# EAGLE board double_in1_atmega_pannelized (EAGLE 9.1.0)
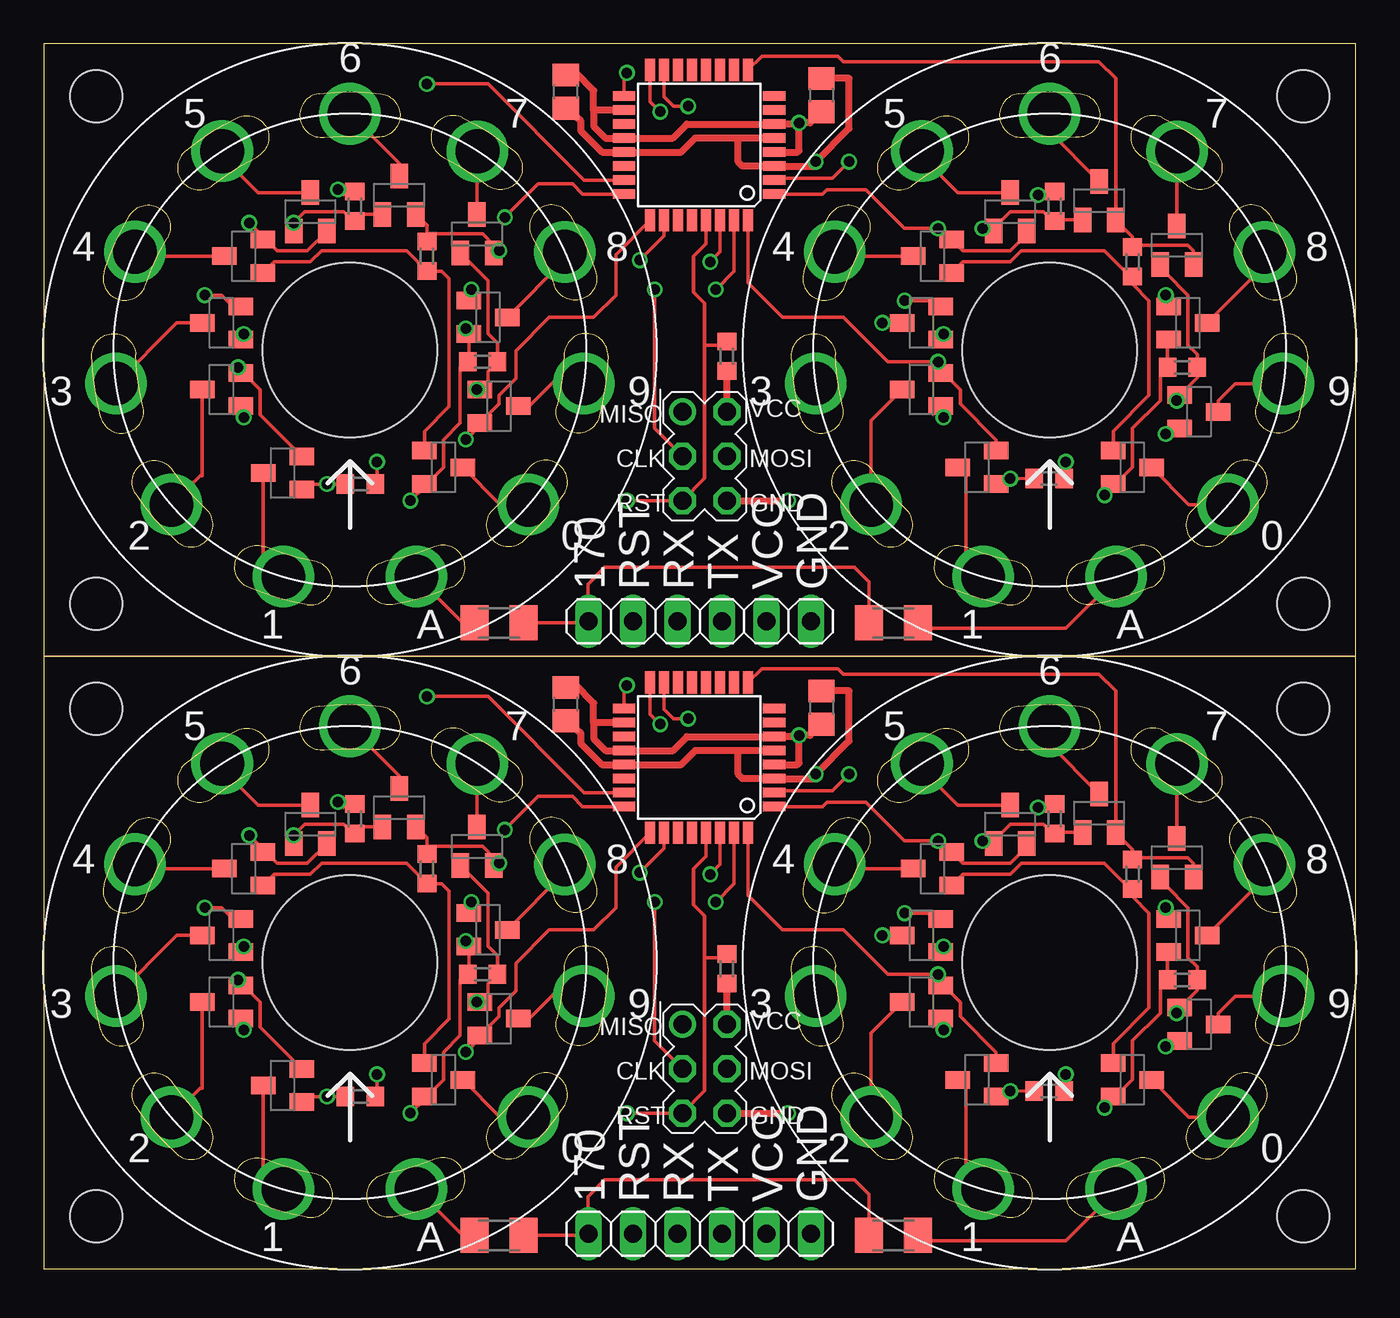
[diagram p0: board, top side]
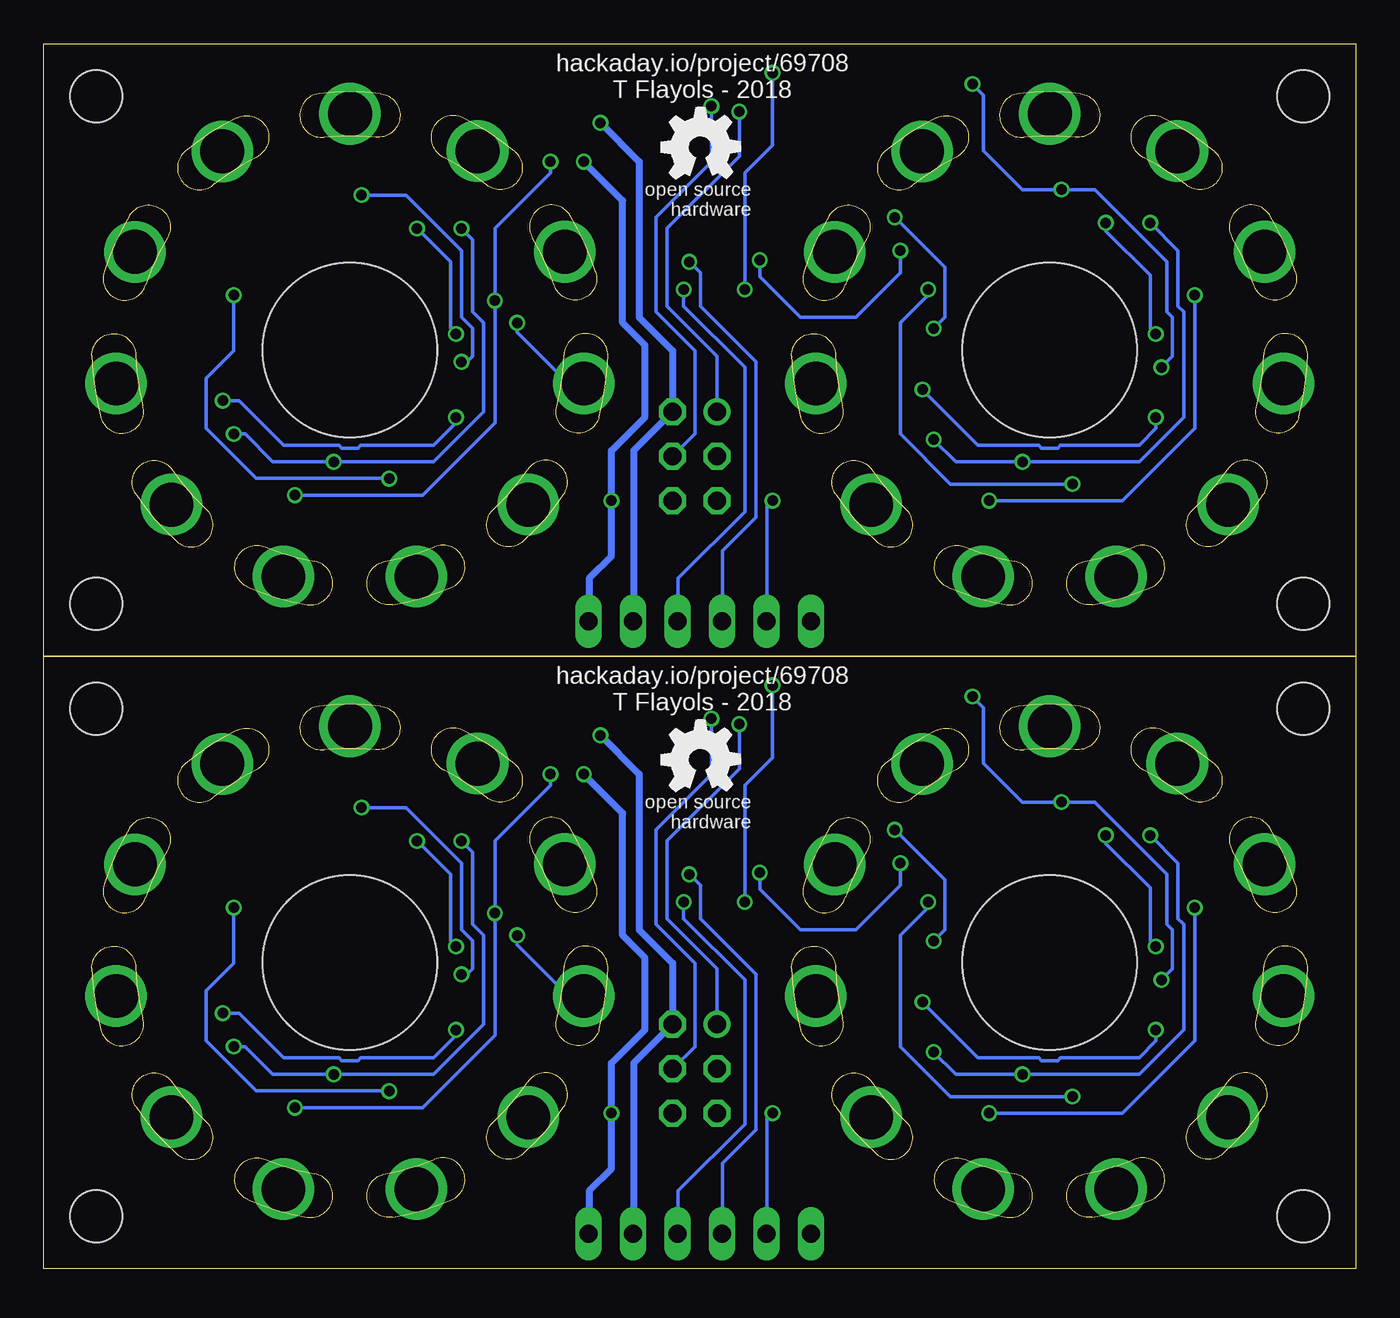
[diagram p1: board, bottom side, seen from below]

Size 75 x 70 mm. Coordinates in mm from the lower left corner, seen from the top.
Outline: 75,35 75,0 0,0 0,35
Outline: 75,35 0,35
Outline: 0,35 75,35
Outline: 75,35 75,70 0,70 0,35
Copper layers (1*16): Top 0.035mm / dielectric 1.5mm / Bottom 0.035mm
Design rules "SeeedStudio_2layer_DRU_no_angle_20140221": minimum track width 6mil, minimum drill 12mil, track to track 6mil, track to pad 6mil, pad to pad 6mil, via to via 6mil, smd to smd 0mil, copper to edge 10mil, drill to drill 10mil, minimum pad ring 10mil, minimum via ring 6mil, stop-mask expansion 2mil, vias tented up to drill 100mil, thermal gap 10mil
Net classes: 0 default: clearance 0.205 mm
Holes 3 mm at 3,32 3,3 72,3 72,32 3,67 3,38 72,38 72,67

## Footprints (pad centres in the part's own frame; a part is rotated, then mirrored left to right if it is on the bottom)
C0805 = smd 1.3 x 1.5: 1 -0.95,0; 2 0.95,0
TQFP32-08 = smd 1.27 x 0.559: 1 -4.293,2.8; 2 -4.293,2; 3 -4.293,1.2; 4 -4.293,0.4; 5 -4.293,-0.4; 6 -4.293,-1.2; 7 -4.293,-2; 8 -4.293,-2.8; 17 4.293,-2.8; 18 4.293,-2; 19 4.293,-1.2; 20 4.293,-0.4; 21 4.293,0.4; 22 4.293,1.2; 23 4.293,2; 24 4.293,2.8 | smd 0.559 x 1.27: 9 -2.8,-4.293; 10 -2,-4.293; 11 -1.2,-4.293; 12 -0.4,-4.293; 13 0.4,-4.293; 14 1.2,-4.293; 15 2,-4.293; 16 2.8,-4.293; 25 2.8,4.293; 26 2,4.293; 27 1.2,4.293; 28 0.4,4.293; 29 -0.4,4.293; 30 -1.2,4.293; 31 -2,4.293; 32 -2.8,4.293
AVR-ISP-6PIN-SMAILL-SILK = drill 1.016 octagon: GND 1.27,-2.54; MOSI 1.27,0; RESET -1.27,-2.54; SCK -1.27,0; VCC 1.27,2.54 | drill 1.016: MISO -1.27,2.54
1X06 = drill 1.016 long: 1 -6.35,0; 2 -3.81,0; 3 -1.27,0; 4 1.27,0; 5 3.81,0; 6 6.35,0
R0603 = smd 1 x 1.1: 1 -0.85,0; 2 0.85,0
M1206 = smd 1.6 x 2: 1 -1.4,0; 2 1.4,0
SOT23-BEC = smd 1 x 1.4: B -0.95,-1.1; C 0,1.1; E 0.95,-1.1
LC-516 = drill 2.5: A 3.8,-12.95; P0 10.205,-8.84; P1 -3.8,-12.95; P2 -10.205,-8.84; P3 -13.365,-1.915; P4 -12.28,5.615; P5 -7.3,11.36; P6 -0.01,13.5; P7 7.295,11.355; P8 12.28,5.61; P9 13.36,-1.915 | hole 10: 0,0

## Placement (x,y rotation side)
C1  [C0805]  44.45,32.07 270 top
C2  [C0805]  29.84,32.26 90 top
C3  [C0805]  44.45,67.07 270 top
C4  [C0805]  29.84,67.26 90 top
GOLD_ORB_SM1  OSHWLOGOLOGO5MM  [OSHW_5MM]  37.47,29.08 0 bottom
GOLD_ORB_SM2  OSHWLOGOLOGO5MM  [OSHW_5MM]  37.47,64.08 0 bottom
IC1  MEGA8-AI  [TQFP32-08]  37.47,29.21 180 top
IC2  MEGA8-AI  [TQFP32-08]  37.47,64.21 180 top
J1  AVR-ISP-6PINAVR-ISP-6PIN-SMALL-SILK  [AVR-ISP-6PIN-SMAILL-SILK]  37.78,11.43 0 top
J2  AVR-ISP-6PINAVR-ISP-6PIN-SMALL-SILK  [AVR-ISP-6PIN-SMAILL-SILK]  37.78,46.43 0 top
JP1  [1X06]  37.5,2 0 top
JP2  [1X06]  37.5,37 0 top
R1  [R0603]  25.08,16.83 0 top
R2  [R0603]  17.78,25.72 270 top
R3  [R0603]  21.91,22.86 270 top
R4  [R0603]  18.1,9.84 180 top
R5  [M1206]  26.04,1.91 0 top
R6  [R0603]  65.09,16.51 0 top
R7  [R0603]  57.78,25.72 270 top
R8  [R0603]  62.23,22.54 270 top
R9  [R0603]  57.47,10.16 180 top
R10  [M1206]  48.58,1.91 180 top
R11  [R0603]  39.05,17.14 270 top
R12  [R0603]  25.08,51.83 0 top
R13  [R0603]  17.78,60.72 270 top
R14  [R0603]  21.91,57.86 270 top
R15  [R0603]  18.1,44.84 180 top
R16  [M1206]  26.04,36.91 0 top
R17  [R0603]  65.09,51.51 0 top
R18  [R0603]  57.78,60.72 270 top
R19  [R0603]  62.23,57.54 270 top
R20  [R0603]  57.47,45.16 180 top
R21  [M1206]  48.58,36.91 180 top
R22  [R0603]  39.05,52.15 270 top
T1  [SOT23-BEC]  50.16,15.24 90 top
T2  [SOT23-BEC]  10.16,15.24 90 top
T3  [SOT23-BEC]  24.77,24.13 0 top
T4  [SOT23-BEC]  26.04,14.29 270 top
T5  [SOT23-BEC]  10.16,19.05 90 top
T6  [SOT23-BEC]  20.32,26.35 0 top
T7  [SOT23-BEC]  15.24,25.4 0 top
T8  [SOT23-BEC]  22.86,10.79 270 top
T9  [SOT23-BEC]  64.77,23.5 0 top
T10  [SOT23-BEC]  11.43,22.86 90 top
T11  [SOT23-BEC]  25.4,19.37 270 top
T12  [SOT23-BEC]  13.65,10.48 90 top
T13  [SOT23-BEC]  66.04,13.97 270 top
T14  [SOT23-BEC]  50.16,19.05 90 top
T15  [SOT23-BEC]  60.33,26.04 0 top
T16  [SOT23-BEC]  55.24,25.4 0 top
T17  [SOT23-BEC]  62.23,10.79 270 top
T18  [SOT23-BEC]  50.8,22.86 90 top
T19  [SOT23-BEC]  65.41,19.05 270 top
T20  [SOT23-BEC]  53.34,10.79 90 top
T21  [SOT23-BEC]  10.16,50.24 90 top
T22  [SOT23-BEC]  24.77,59.13 0 top
T23  [SOT23-BEC]  26.04,49.29 270 top
T24  [SOT23-BEC]  10.16,54.05 90 top
T25  [SOT23-BEC]  20.32,61.35 0 top
T26  [SOT23-BEC]  15.24,60.4 0 top
T27  [SOT23-BEC]  22.86,45.8 270 top
T28  [SOT23-BEC]  11.43,57.86 90 top
T29  [SOT23-BEC]  25.4,54.37 270 top
T30  [SOT23-BEC]  13.65,45.48 90 top
T31  [SOT23-BEC]  50.16,50.24 90 top
T32  [SOT23-BEC]  64.77,58.49 0 top
T33  [SOT23-BEC]  66.04,48.97 270 top
T34  [SOT23-BEC]  50.16,54.05 90 top
T35  [SOT23-BEC]  60.33,61.03 0 top
T36  [SOT23-BEC]  55.24,60.4 0 top
T37  [SOT23-BEC]  62.23,45.8 270 top
T38  [SOT23-BEC]  50.8,57.86 90 top
T39  [SOT23-BEC]  65.41,54.05 270 top
T40  [SOT23-BEC]  53.34,45.8 90 top
U$1  LC-516  [LC-516]  17.5,17.5 0 top
U$2  LC-516  [LC-516]  57.5,17.5 0 top
U$3  LC-516  [LC-516]  17.5,52.5 0 top
U$4  LC-516  [LC-516]  57.5,52.5 0 top

## Library data of the parts
C1-C4 = eagle-ltspice; SPICEMODEL: NONE; SPICEPREFIX: C
GOLD_ORB_SM1 GOLD_ORB_SM2 = oshw
IC1 IC2 = atmel; MPN: ATMEGA8-16AU; OC_FARNELL: 9171371; OC_NEWARK: 73M8863
J1 J2 = avr-isp
JP1 JP2 = pinhead
R1-R4 R6-R9 R11-R15 R17-R20 R22 = resistor
R5 R10 R16 R21 = rcl; SPICEPREFIX: R
T1-T40 = transistor
U$1-U$4 = LC-516_play

## Nets
+15V: JP1.1 R5.2 R10.2
+15V1: JP2.1 R16.2 R21.2
A0: T8.C U$1.P0
A1: T12.C U$1.P1
A2: T2.C U$1.P2
A3: T5.C U$1.P3
A4: T10.C U$1.P4
A5: T7.C U$1.P5
A6: T6.C U$1.P6
A7: T3.C U$1.P7
A8: T11.C U$1.P8
A9: T4.C U$1.P9
A10: T30.C U$3.P1
A11: T21.C U$3.P2
A12: T24.C U$3.P3
A13: T28.C U$3.P4
A14: T26.C U$3.P5
A15: T25.C U$3.P6
A16: T22.C U$3.P7
A17: T29.C U$3.P8
A18: T23.C U$3.P9
A19: T27.C U$3.P0
B0: T17.C U$2.P0
B1: T20.C U$2.P1
B2: T1.C U$2.P2
B3: T14.C U$2.P3
B4: T18.C U$2.P4
B5: T16.C U$2.P5
B6: T15.C U$2.P6
B7: T9.C U$2.P7
B8: T19.C U$2.P8
B9: T13.C U$2.P9
B10: T31.C U$4.P2
B11: T32.C U$4.P7
B12: T33.C U$4.P9
B13: T34.C U$4.P3
B14: T35.C U$4.P6
B15: T36.C U$4.P5
B16: T37.C U$4.P0
B17: T38.C U$4.P4
B18: T39.C U$4.P8
B19: T40.C U$4.P1
GND: C1.1 C2.1 IC1.3 IC1.5 IC1.21 J1.GND JP1.6
GND1: C3.1 C4.1 IC2.3 IC2.5 IC2.21 J2.GND JP2.6
N$1: R10.1 U$2.A
N$2: IC1.29 J1.RESET JP1.2 R11.1
N$3: R16.1 U$3.A
N$4: R5.1 U$1.A
N$5: IC1.16 J1.MISO
N$6: IC2.29 J2.RESET JP2.2 R22.1
N$7: R21.1 U$4.A
N$8: IC2.16 J2.MISO
N$9: IC1.17 J1.SCK
N$10: IC1.15 J1.MOSI
N$11: R6.2 T1.B T9.B T13.B
N$12: R9.2 T19.B T20.B
N$13: R7.2 T14.B T15.B T16.B
N$14: R4.2 T11.B T12.B
N$15: R8.2 T17.B T18.B
N$16: R3.2 T8.B T10.B
N$17: R2.2 T5.B T6.B T7.B
N$18: R1.2 T2.B T3.B T4.B
N$19: IC2.17 J2.SCK
N$20: IC2.15 J2.MOSI
N$21: R17.2 T31.B T32.B T33.B
N$22: R20.2 T39.B T40.B
N$23: R19.2 T37.B T38.B
N$24: R18.2 T34.B T35.B T36.B
N$25: R15.2 T29.B T30.B
N$26: R14.2 T27.B T28.B
N$27: R13.2 T24.B T25.B T26.B
N$28: R12.2 T21.B T22.B T23.B
RX: IC1.30 JP1.3
RX1: IC2.30 JP2.3
TSA1: IC1.24 R1.1 T5.E T8.E T11.E
TSA2: IC1.23 R2.1 T2.E T12.E
TSA3: IC1.26 R3.1 T3.E T6.E
TSA4: IC1.25 R4.1 T4.E T7.E T10.E
TSA5: IC2.23 R13.1 T21.E T30.E
TSA6: IC2.26 R14.1 T22.E T25.E
TSA7: IC2.25 R15.1 T23.E T26.E T28.E
TSA8: IC2.24 R12.1 T24.E T27.E T29.E
TSB1: IC1.32 R7.1 T1.E T20.E
TSB2: IC1.2 R6.1 T14.E T17.E T19.E
TSB3: IC1.9 R8.1 T9.E T15.E
TSB4: IC1.1 R9.1 T13.E T16.E T18.E
TSB5: IC2.32 R18.1 T31.E T40.E
TSB6: IC2.2 R17.1 T34.E T37.E T39.E
TSB7: IC2.9 R19.1 T32.E T35.E
TSB8: IC2.1 R20.1 T33.E T36.E T38.E
TX: IC1.31 JP1.4
TX1: IC2.31 JP2.4
VCC: C1.2 C2.2 IC1.4 IC1.6 IC1.18 IC1.20 J1.VCC JP1.5 R11.2
VCC1: C3.2 C4.2 IC2.4 IC2.6 IC2.18 IC2.20 J2.VCC JP2.5 R22.2

## Tracks (layer width: path | path; a pad name or v marks a point on that pad's centre or on a via)
+15V
  Top 0.203: R5.2 31.05,1.91 31.11,1.97 | 31.11,1.97 JP1.1 | 31.11,1.97 31.11,4.13 32.07,5.08 46.35,5.08 47.18,4.26 R10.2
+15V1
  Top 0.203: R16.2 31.05,36.91 31.11,36.97 | 31.11,36.97 JP2.1 | 31.11,36.97 31.11,39.13 32.07,40.08 46.35,40.08 47.18,39.26 R21.2
A0
  Top 0.203: T8.C 26.09,8.66 U$1.P0
A1
  Top 0.203: T12.C 12.55,5.7 U$1.P1
A2
  Top 0.203: T2.C 9.06,10.32 8.95,10.32 U$1.P2
A3
  Top 0.203: 8.47,19.05 T5.C 7.6,19.05 U$1.P3
A4
  Top 0.203: T10.C 5.47,22.86 U$1.P4
A5
  Top 0.203: T7.C 12.25,26.5 10.2,28.55 U$1.P5
A6
  Top 0.203: 20.03,27.45 T6.C 20.32,28.17 U$1.P6
A7
  Top 0.203: T3.C 24.77,26.35 24.77,27.48 24.77,28.82 U$1.P7
A8
  Top 0.203: T11.C 29.78,22.65 U$1.P8
A9
  Top 0.203: T4.C 27.74,14.29 29.27,15.81 29.5,15.59 U$1.P9
A10
  Top 0.203: T30.C 12.55,40.7 U$3.P1
A11
  Top 0.203: T21.C 9.06,45.32 8.95,45.32 U$3.P2
A12
  Top 0.203: 8.47,54.05 T24.C 7.6,54.05 U$3.P3
A13
  Top 0.203: T28.C 5.47,57.86 U$3.P4
A14
  Top 0.203: T26.C 12.25,61.5 10.2,63.55 U$3.P5
A15
  Top 0.203: 20.03,62.45 T25.C 20.32,63.17 U$3.P6
A16
  Top 0.203: T22.C 24.77,61.35 24.77,62.48 24.77,63.83 U$3.P7
A17
  Top 0.203: T29.C 29.78,57.65 U$3.P8
A18
  Top 0.203: T23.C 27.74,49.29 29.27,50.81 29.5,50.59 U$3.P9
A19
  Top 0.203: T27.C 26.09,43.66 U$3.P0
B0
  Top 0.203: T17.C 65.47,8.66 U$2.P0
B1
  Top 0.203: T20.C 52.7,10.79 52.7,5.71 53.98,4.45 53.7,4.49 U$2.P1
B2
  Top 0.203: T1.C 47.3,13.47 U$2.P2
B3  (via drill 0.6)
  Top 0.203: T14.C v47.94,19.05
  Bottom 0.203: v47.94,19.05 47.94,18.52 45.01,15.59 U$2.P3
B4
  Top 0.203: 49.6,22.96 T18.C 46.32,22.86 46.07,23.11 U$2.P4
B5
  Top 0.203: T16.C 52.25,26.5 50.2,28.55 U$2.P5
B6
  Top 0.203: T15.C 60.33,27.16 57.49,29.99 U$2.P6
B7
  Top 0.203: T9.C 64.77,27.48 64.8,27.5 U$2.P7
B8
  Top 0.203: T19.C 69.78,22.32 U$2.P8
B9
  Top 0.203: U$2.P9 68.12,15.59 67.14,14.61 T13.C
B10
  Top 0.203: T31.C 47.3,48.47 U$4.P2
B11
  Top 0.203: T32.C 64.77,62.48 64.8,62.5 U$4.P7
B12
  Top 0.203: U$4.P9 68.12,50.59 67.14,49.6 T33.C
B13  (via drill 0.6)
  Top 0.203: T34.C v47.94,54.05
  Bottom 0.203: v47.94,54.05 47.94,53.52 45.01,50.59 U$4.P3
B14
  Top 0.203: T35.C 60.33,62.16 57.49,64.99 U$4.P6
B15
  Top 0.203: T36.C 52.25,61.5 50.2,63.55 U$4.P5
B16
  Top 0.203: T37.C 65.47,43.66 U$4.P0
B17
  Top 0.203: 49.6,57.96 T38.C 46.32,57.86 46.07,58.12 U$4.P4
B18
  Top 0.203: T39.C 69.78,57.33 U$4.P8
B19
  Top 0.203: T40.C 52.7,45.8 52.7,40.72 53.98,39.45 53.7,39.49 U$4.P1
GND  (via drill 0.6)
  Top 0.406: J1.GND v42.55,8.89 | IC1.5 39.69,29.61 | 39.69,29.61 37.23,29.61 36.43,28.81 IC1.21 31.92,28.81 30.69,30.04 30.69,30.59 C2.1 | C1.1 46.04,33.02 46.04,30.16 v44.13,28.26 44.13,28.01 IC1.3 39.94,28.01 39.69,28.26 39.69,29.61
  Bottom 0.406: JP1.6 43.81,2.04 43.81,4.45 42.55,5.71 v42.55,8.89 42.55,11.75 40.64,13.65 40.64,17.78 41.91,19.05 41.91,26.04 v44.13,28.26
GND1  (via drill 0.6)
  Top 0.406: J2.GND v42.55,43.89 | IC2.5 39.69,64.61 | 39.69,64.61 37.23,64.61 36.43,63.81 IC2.21 31.92,63.81 30.69,65.04 30.69,65.59 C4.1 | C3.1 46.04,68.02 46.04,65.16 v44.13,63.26 44.13,63.01 IC2.3 39.94,63.01 39.69,63.26 39.69,64.61
  Bottom 0.406: JP2.6 43.81,37.03 43.81,39.45 42.55,40.72 v42.55,43.89 42.55,46.75 40.64,48.65 40.64,52.78 41.91,54.05 41.91,61.03 v44.13,63.26
N$1
  Top 0.203: U$2.A 61.3,4.47 58.42,1.59 50.3,1.59 R10.1
N$2  (via drill 0.6)
  Top 0.203: 37.78,17.78 37.78,20.17 37.15,20.8 37.15,22.86 37.87,23.58 IC1.29 | 37.78,17.78 37.78,10.16 J1.RESET v33.34,8.89 | R11.1 38.72,17.78 37.78,17.78
  Bottom 0.203: v33.34,8.89 33.66,8.57 33.66,2.04 JP1.2
N$3
  Top 0.203: U$3.A 23.95,36.91 R16.1
N$4
  Top 0.203: U$1.A 23.95,1.91 R5.1
N$5  (via drill 0.6)
  Top 0.203: v35.24,31.11 34.66,31.69 IC1.16
  Bottom 0.203: J1.MISO 36.51,17.14 39.37,20 39.37,24.45 35.24,28.57 v35.24,31.11
N$6  (via drill 0.6)
  Top 0.203: 37.78,52.78 37.78,55.17 37.15,55.8 37.15,57.86 37.87,58.58 IC2.29 | 37.78,52.78 37.78,45.16 J2.RESET v33.34,43.89 | R22.1 38.72,52.78 37.78,52.78
  Bottom 0.203: v33.34,43.89 33.66,43.57 33.66,37.03 JP2.2
N$7
  Top 0.203: U$4.A 61.3,39.47 58.42,36.59 50.3,36.59 R21.1
N$8  (via drill 0.6)
  Top 0.203: v35.24,66.11 34.66,66.69 IC2.16
  Bottom 0.203: J2.MISO 36.51,52.15 39.37,55 39.37,59.45 35.24,63.58 v35.24,66.11
N$9  (via drill 0.6)
  Top 0.203: J1.SCK 34.92,13.02 v34.92,20.95 | IC1.17 33.17,33.17 v33.34,33.34
  Bottom 0.203: v34.92,20.95 34.92,27.62 33.34,29.21 v33.34,33.34
N$10  (via drill 0.6)
  Top 0.203: IC1.15 35.47,31.97 36,31.43 v36.83,31.43
  Bottom 0.203: J1.MOSI 37.78,12.7 37.78,17.46 40.01,19.68 40.01,25.08 36.83,28.26 v36.83,31.43
N$11  (via drill 0.6)
  Top 0.203: 50.81,13.84 T1.B 51.44,14.29 v51.44,13.65 | T9.B 64.14,22.23 64.14,21.91 65.41,20.64 65.41,17.78 65.94,17.25 R6.2 65.94,15.92 T13.B 64.77,14.75 v64.77,14.61
  Bottom 0.203: v51.44,13.65 51.44,13.34 52.7,12.06 56.87,12.06 57.04,11.89 57.96,11.89 58.13,12.06 61.28,12.06 63.82,14.61 v64.77,14.61
N$12  (via drill 0.6)
  Top 0.203: T20.B 54.74,10.14 v55.24,10.15 | v55.24,10.15 v55.25,10.15 | v55.25,10.15 R9.2 | T19.B 64.31,20.47 v64.14,20.64 | v55.25,10.15 v55.24,10.15 | v55.24,10.15
  Bottom 0.203: v64.14,20.64 64.14,17.46 65.72,15.88 65.72,13.02 62.87,10.16 v55.26,10.16 v55.25,10.15
N$13  (via drill 0.6)
  Top 0.203: v53.66,24.45 54.15,24.45 T16.B 54.3,24.45 55.24,25.4 57.13,25.4 57.47,25.07 R7.2 57.92,24.93 T15.B | v51.44,18.41 51.27,18.25 T14.B
  Bottom 0.203: v53.66,24.45 51.75,22.54 51.75,18.73 v51.44,18.41
N$14  (via drill 0.6)
  Top 0.203: T12.B 15.07,9.84 v16.19,9.84 R4.2 | v24.45,20.95 24.3,20.81 T11.B
  Bottom 0.203: v16.19,9.84 23.18,9.84 26.04,12.7 26.04,19.05 24.45,20.64 v24.45,20.95
N$15
  Top 0.203: T18.B 52.53,22.54 55.24,22.54 55.88,23.18 60.64,23.18 62.13,21.69 R8.2 62.23,21.27 63.18,20.32 63.18,14.92 61.13,12.87 T17.B
N$16
  Top 0.203: T10.B 13.16,22.54 15.24,22.54 15.88,23.18 20.74,23.18 R3.2 22.74,22.01 23.18,21.57 23.18,14.29 21.76,12.87 T8.B
N$17  (via drill 0.6)
  Top 0.203: T6.B 17.96,25.25 R2.2 17.48,25.07 17.14,25.4 14.92,25.4 v14.29,24.77 T7.B | T5.B 11.43,18.1 v11.43,18.41
  Bottom 0.203: v11.43,18.41 11.75,18.73 11.75,21.76 T7.B v14.29,24.77
N$18  (via drill 0.6)
  Top 0.203: T3.B 25.4,21.45 25.4,18.41 25.93,17.88 R1.2 25.4,16.3 25.4,15.7 T4.B v24.77,15.24 | T2.B 11.43,14.12 v11.43,13.65 11.26,13.82 T2.B
  Bottom 0.203: v24.77,15.24 21.59,12.06 18.13,12.06 17.96,11.89 17.04,11.89 16.87,12.06 12.38,12.06 11.43,13.02 v11.43,13.65
N$19  (via drill 0.6)
  Top 0.203: J2.SCK 34.92,48.02 v34.92,55.95 | IC2.17 33.17,68.17 v33.34,68.34
  Bottom 0.203: v34.92,55.95 34.92,62.62 33.34,64.21 v33.34,68.34
N$20  (via drill 0.6)
  Top 0.203: IC2.15 35.47,66.97 36,66.43 v36.83,66.43
  Bottom 0.203: J2.MOSI 37.78,47.7 37.78,52.46 40.01,54.69 40.01,60.08 36.83,63.26 v36.83,66.43
N$21  (via drill 0.6)
  Top 0.203: 50.81,48.84 T31.B 51.44,49.29 v51.44,48.65 | T32.B 64.14,57.23 64.14,56.91 65.41,55.64 65.41,52.78 65.94,52.25 R17.2 65.94,50.92 T33.B 64.77,49.75 v64.77,49.6
  Bottom 0.203: v51.44,48.65 51.44,48.34 52.7,47.06 56.87,47.06 57.04,46.89 57.96,46.89 58.13,47.06 61.28,47.06 63.82,49.6 v64.77,49.6
N$22  (via drill 0.6)
  Top 0.203: T40.B 54.74,45.15 v55.24,45.15 | v55.24,45.15 v55.25,45.15 | v55.25,45.15 R20.2 | T39.B 64.31,55.47 v64.14,55.64 | v55.25,45.15 v55.24,45.15 | v55.24,45.15
  Bottom 0.203: v64.14,55.64 64.14,52.46 65.72,50.88 65.72,48.02 62.87,45.16 v55.26,45.16 v55.25,45.15
N$23
  Top 0.203: T38.B 52.53,57.54 55.24,57.54 55.88,58.18 60.64,58.18 62.13,56.69 R19.2 62.23,56.27 63.18,55.32 63.18,49.92 61.13,47.87 T37.B
N$24  (via drill 0.6)
  Top 0.203: v53.66,59.45 54.15,59.45 T36.B 54.3,59.45 55.24,60.4 57.13,60.4 57.47,60.07 R18.2 57.92,59.94 T35.B | v51.44,53.41 51.27,53.24 T34.B
  Bottom 0.203: v53.66,59.45 51.75,57.54 51.75,53.73 v51.44,53.41
N$25  (via drill 0.6)
  Top 0.203: T30.B 15.07,44.84 v16.19,44.84 R15.2 | v24.45,55.95 24.3,55.81 T29.B
  Bottom 0.203: v16.19,44.84 23.18,44.84 26.04,47.7 26.04,54.05 24.45,55.64 v24.45,55.95
N$26
  Top 0.203: T28.B 13.16,57.54 15.24,57.54 15.88,58.18 20.74,58.18 R14.2 22.74,57.01 23.18,56.58 23.18,49.29 21.76,47.87 T27.B
N$27  (via drill 0.6)
  Top 0.203: T25.B 17.96,60.25 R13.2 17.48,60.07 17.14,60.4 14.92,60.4 v14.29,59.77 T26.B | T24.B 11.43,53.1 v11.43,53.41
  Bottom 0.203: v11.43,53.41 11.75,53.73 11.75,56.76 T26.B v14.29,59.77
N$28  (via drill 0.6)
  Top 0.203: T22.B 25.4,56.45 25.4,53.41 25.93,52.88 R12.2 25.4,51.3 25.4,50.7 T23.B v24.77,50.24 | T21.B 11.43,49.12 v11.43,48.65 11.26,48.82 T21.B
  Bottom 0.203: v24.77,50.24 21.59,47.06 18.13,47.06 17.96,46.89 17.04,46.89 16.87,47.06 12.38,47.06 11.43,48.02 v11.43,48.65
RX  (via drill 0.6)
  Top 0.203: IC1.30 38.66,23.11 v38.1,22.54
  Bottom 0.203: JP1.3 36.2,2.04 36.2,6.03 34.29,7.94 34.29,16.83 37.47,20 37.47,21.91 v38.1,22.54
RX1  (via drill 0.6)
  Top 0.203: IC2.30 38.66,58.11 v38.1,57.54
  Bottom 0.203: JP2.3 36.2,37.03 36.2,41.03 34.29,42.94 34.29,51.83 37.47,55 37.47,56.91 v38.1,57.54
TSA1  (via drill 0.6)
  Top 0.203: IC1.24 30.8,26.41 30.22,26.99 28.26,26.99 v26.35,25.08 | T11.E 24.43,18.29 | T5.E 10.79,20 10.16,20.64 v9.21,20.64 | v20.95,8.89 21.76,9.7 T8.E 21.91,9.85 22.86,10.79 22.86,12.38 23.81,13.34 23.81,16.51 24.43,17.13 R1.1 24.3,16.89 T11.E | v24.13,18.73 24.13,18.42 T11.E
  Bottom 0.203: v9.21,20.64 9.21,13.02 13.34,8.89 v20.95,8.89 | 23.98,18.73 v24.13,18.73 23.5,19.37 23.5,22.23 v26.35,25.08
TSA2  (via drill 0.6)
  Top 0.203: 14.93,11.43 T12.E 12.38,13.8 12.38,15.24 11.43,16.19 | 11.43,16.19 T2.E | 11.43,16.19 v11.11,16.51 | v16.83,26.67 17.13,26.37 R2.1 | v21.91,32.7 25.4,32.7 30.89,27.21 IC1.23
  Bottom 0.203: v11.11,16.51 10.48,17.14 10.48,19.37 10.79,19.68 10.79,22.54 14.92,26.67 v16.83,26.67 19.05,26.67 21.27,28.89 21.27,32.07 v21.91,32.7
TSA3  (via drill 0.6)
  Top 0.203: 25.71,23.5 25.08,24.13 21.91,24.13 | 25.71,23.5 T3.E | 25.71,23.5 v26.04,23.18 | IC1.26 35.47,24.04 v34.07,22.64 | T6.E 21.91,24.61 21.91,24.13 | 21.91,24.13 R3.1
  Bottom 0.203: v26.04,23.18 26.04,21.91 28.57,19.37 31.75,19.37 34.07,21.69 v34.07,22.64
TSA4  (via drill 0.6)
  Top 0.203: T7.E 15.07,23.18 13.34,23.18 12.7,23.81 T10.E 12.53,23.98 v11.75,24.77 | 24.93,13.48 T4.E | IC1.25 32.7,22.95 32.7,20.64 31.43,19.37 28.89,19.37 26.99,17.46 26.99,15.88 26.04,14.92 26.04,14.44 T4.E | v24.13,12.38 24.93,13.19 T4.E | R4.1 19.05,9.95 v19.05,11.11
  Bottom 0.203: v24.13,12.38 22.86,11.11 v19.05,11.11 12.38,11.11 9.84,13.65 9.84,19.68 10.16,20 10.16,23.18 v11.75,24.77
TSA5  (via drill 0.6)
  Top 0.203: 14.93,46.43 T30.E 12.38,48.8 12.38,50.24 11.43,51.19 | 11.43,51.19 T21.E | 11.43,51.19 v11.11,51.51 | v16.83,61.67 17.13,61.37 R13.1 | v21.91,67.7 25.4,67.7 30.89,62.21 IC2.23
  Bottom 0.203: v11.11,51.51 10.48,52.15 10.48,54.37 10.79,54.69 10.79,57.54 14.92,61.67 v16.83,61.67 19.05,61.67 21.27,63.89 21.27,67.07 v21.91,67.7
TSA6  (via drill 0.6)
  Top 0.203: 25.71,58.5 25.08,59.13 21.91,59.13 | 25.71,58.5 T22.E | 25.71,58.5 v26.04,58.18 | IC2.26 35.47,59.03 v34.07,57.64 | T25.E 21.91,59.62 21.91,59.13 | 21.91,59.13 R14.1
  Bottom 0.203: v26.04,58.18 26.04,56.91 28.57,54.37 31.75,54.37 34.07,56.69 v34.07,57.64
TSA7  (via drill 0.6)
  Top 0.203: T26.E 15.07,58.18 13.34,58.18 12.7,58.81 T28.E 12.53,58.98 v11.75,59.77 | 24.93,48.48 T23.E | IC2.25 32.7,57.95 32.7,55.64 31.43,54.37 28.89,54.37 26.99,52.46 26.99,50.88 26.04,49.92 26.04,49.44 T23.E | v24.13,47.38 24.93,48.19 T23.E | R15.1 19.05,44.95 v19.05,46.11
  Bottom 0.203: v24.13,47.38 22.86,46.11 v19.05,46.11 12.38,46.11 9.84,48.65 9.84,54.69 10.16,55 10.16,58.18 v11.75,59.77
TSA8  (via drill 0.6)
  Top 0.203: IC2.24 30.8,61.41 30.22,61.99 28.26,61.99 v26.35,60.08 | T29.E 24.43,53.28 | T24.E 10.79,55 10.16,55.64 v9.21,55.64 | v20.95,43.89 21.76,44.7 T27.E 21.91,44.84 22.86,45.8 22.86,47.38 23.81,48.34 23.81,51.51 24.43,52.13 R12.1 24.3,51.9 T29.E | v24.13,53.73 24.13,53.42 T29.E
  Bottom 0.203: v9.21,55.64 9.21,48.02 13.34,43.89 v20.95,43.89 | 23.98,53.73 v24.13,53.73 23.5,54.37 23.5,57.23 v26.35,60.08
TSB1  (via drill 0.6)
  Top 0.203: T20.E 54.44,12.38 52.39,14.44 52.39,15.24 51.44,16.19 T1.E 51.27,16.83 v51.12,16.83 48.26,16.83 45.72,19.37 42.23,19.37 40.27,21.33 IC1.32 | v56.83,26.35 58.1,26.35 R7.1
  Bottom 0.203: v56.83,26.35 54.29,26.35 51.12,23.18 51.12,19.37 50.48,18.73 50.48,17.14 50.8,16.83 v51.12,16.83
TSB2  (via drill 0.6)
  Top 0.203: 64.12,17.91 T19.E 64.24,18.03 R6.1 63.82,16.52 63.82,14.61 62.23,13.02 62.23,10.79 61.28,9.85 T17.E 61.28,9.84 v60.64,9.21 | T14.E 51.12,20 50.8,20.32 v49.21,20.32 | v46.04,28.26 45.09,27.3 42.82,27.3 41.59,27.3 41.69,27.21 IC1.2
  Bottom 0.203: v60.64,9.21 53.34,9.21 49.21,13.34 v49.21,20.32 49.21,24.45 46.04,27.62 v46.04,28.26
TSB3
  Top 0.203: T9.E 65.72,23.18 65.41,23.5 62.24,23.5 R8.1 62.23,23.98 T15.E 61.28,33.02 60.33,33.97 45.72,33.97 45.4,34.29 41.05,34.29 IC1.9
TSB4  (via drill 0.6)
  Top 0.203: T16.E 56.2,24.13 55.24,23.18 52.53,23.18 T18.E 51.76,23.81 v51.12,24.45 49.21,24.45 46.99,26.67 44.77,26.67 44.51,26.41 IC1.1 | R9.1 58.44,11.11 v58.42,11.11 | v64.14,12.7 64.31,12.87 T13.E
  Bottom 0.203: v64.14,12.7 63.5,12.7 61.91,11.11 v58.42,11.11 52.7,11.11 49.85,13.97 49.85,19.05 50.48,19.68 50.48,23.81 v51.12,24.45
TSB5  (via drill 0.6)
  Top 0.203: T40.E 54.44,47.38 52.39,49.44 52.39,50.24 51.44,51.19 T31.E 51.27,51.83 v51.12,51.83 48.26,51.83 45.72,54.37 42.23,54.37 40.27,56.33 IC2.32 | v56.83,61.35 58.1,61.35 R18.1
  Bottom 0.203: v56.83,61.35 54.29,61.35 51.12,58.18 51.12,54.37 50.48,53.73 50.48,52.15 50.8,51.83 v51.12,51.83
TSB6  (via drill 0.6)
  Top 0.203: 64.12,52.91 T39.E 64.24,53.03 R17.1 63.82,51.52 63.82,49.6 62.23,48.02 62.23,45.8 61.28,44.84 T37.E 61.28,44.84 v60.64,44.21 | T34.E 51.12,55 50.8,55.32 v49.21,55.32 | v46.04,63.26 45.09,62.3 42.82,62.3 41.59,62.3 41.69,62.21 IC2.2
  Bottom 0.203: v60.64,44.21 53.34,44.21 49.21,48.34 v49.21,55.32 49.21,59.45 46.04,62.62 v46.04,63.26
TSB7
  Top 0.203: T32.E 65.72,58.18 65.41,58.49 62.24,58.49 R19.1 62.23,58.98 T35.E 61.28,68.02 60.33,68.97 45.72,68.97 45.4,69.29 41.05,69.29 IC2.9
TSB8  (via drill 0.6)
  Top 0.203: T36.E 56.2,59.13 55.24,58.18 52.53,58.18 T38.E 51.76,58.81 v51.12,59.45 49.21,59.45 46.99,61.67 44.77,61.67 44.51,61.41 IC2.1 | R20.1 58.44,46.11 v58.42,46.11 | v64.14,47.7 64.31,47.87 T33.E
  Bottom 0.203: v64.14,47.7 63.5,47.7 61.91,46.11 v58.42,46.11 52.7,46.11 49.85,48.97 49.85,54.05 50.48,54.69 50.48,58.81 v51.12,59.45
TX  (via drill 0.6)
  Top 0.203: IC1.31 39.47,22 v38.42,20.95
  Bottom 0.203: JP1.4 38.73,2.04 38.73,4.45 34.92,8.26 34.92,13.02 34.92,16.51 38.42,20 v38.42,20.95
TX1  (via drill 0.6)
  Top 0.203: IC2.31 39.47,57 v38.42,55.95
  Bottom 0.203: JP2.4 38.73,37.03 38.73,39.45 34.92,43.26 34.92,48.02 34.92,51.51 38.42,55 v38.42,55.95
VCC  (via drill 0.6)
  Top 0.406: J1.VCC R11.2 | C1.2 43.81,30.48 v43.18,30.48 | v43.18,30.48 43.11,30.41 IC1.6 36.76,30.41 35.96,29.61 IC1.20 32.11,29.61 31.43,30.29 31.43,31.18 | IC1.4 43.1,28.81 43.18,28.89 v43.18,30.48 | IC1.18 31.46,31.21 31.43,31.18 | C2.2 30.42,33.34 31.43,32.32 31.43,31.18
  Bottom 0.406: v43.18,30.48 40.96,28.26 40.96,19.37 39.05,17.46 J1.VCC 41.27,11.75 41.27,2.04 JP1.5 41.27,2
VCC1  (via drill 0.6)
  Top 0.406: J2.VCC R22.2 | C3.2 43.81,65.48 v43.18,65.48 | v43.18,65.48 43.11,65.41 IC2.6 36.76,65.41 35.96,64.61 IC2.20 32.11,64.61 31.43,65.29 31.43,66.18 | IC2.4 43.1,63.81 43.18,63.89 v43.18,65.48 | IC2.18 31.46,66.21 31.43,66.18 | C4.2 30.42,68.33 31.43,67.32 31.43,66.18
  Bottom 0.406: v43.18,65.48 40.96,63.26 40.96,54.37 39.05,52.46 J2.VCC 41.27,46.75 41.27,37.03 JP2.5 41.27,37

## Text on the board
tNames: VCC | MISO | CLK | MOSI | RST | GND | 170 | RST | RX | TX | VCC | GND | VCC | MISO | CLK | MOSI | RST | GND | 170 | RST | RX | TX | VCC | GND
bNames: hackaday.io/project/69708 / T Flayols - 2018 | hackaday.io/project/69708 / T Flayols - 2018